# Allegro board demoa2.brd
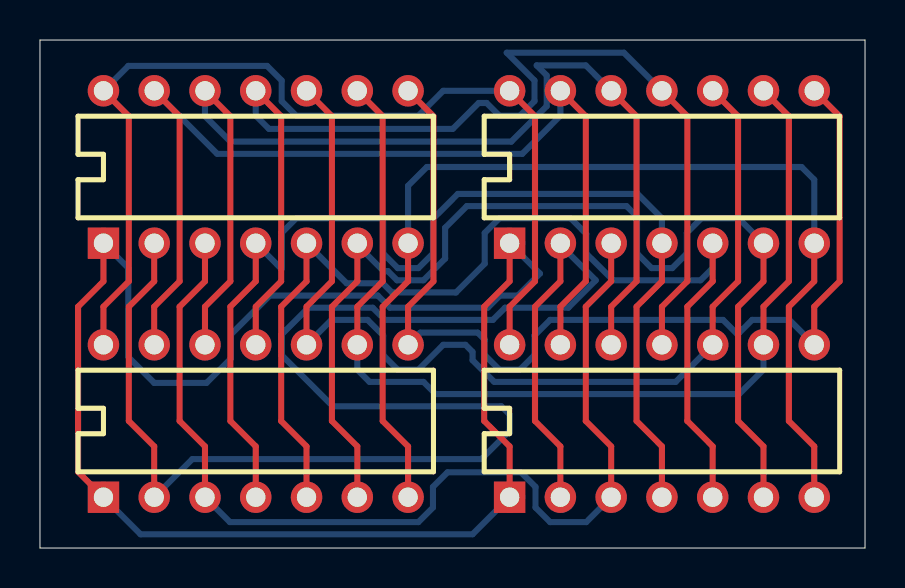
[diagram p0: board, top side]
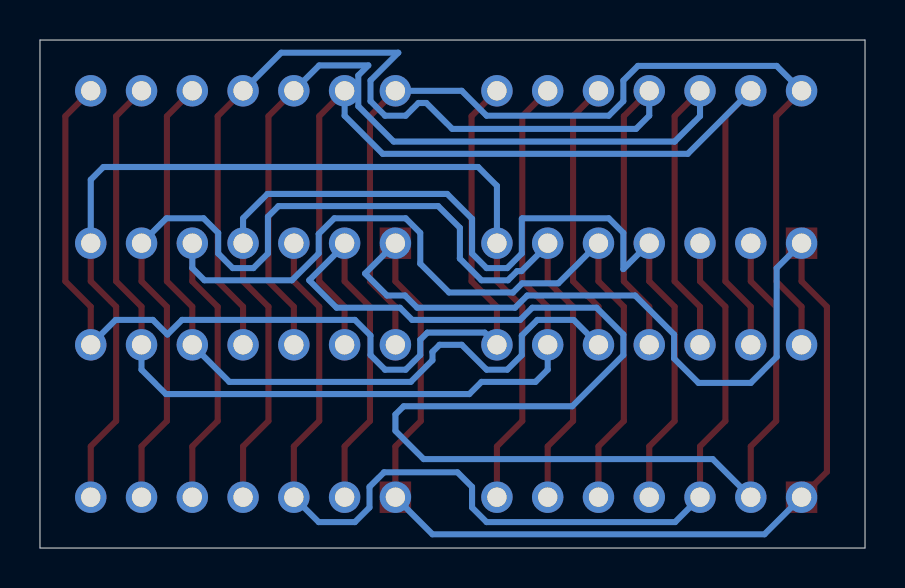
[diagram p1: board, bottom side, seen from below]

Outline 41.27 x 25.4 mm; copper layers: TOP, GND, POWER, INNER1, INNER2, BOTTOM. Coordinates in mm from the lower left corner of the outline.
Outline path: 0,25.4 0,0 41.27,0 41.27,25.4 0,25.4

## Design rules (mm)
nets with their own width: min track width 0.305; nets DAT1 DAT2 DAT3 DAT4 DAT5 DAT6 DAT7 DAT8 DAT9 DAT10 DAT11 DAT12 GND VCC

## Placement (name value [footprint] x y rotation side)
U1  7400  [DIP14]  3.17 15.24 0 top
U2  7400  [DIP14]  23.5 15.24 0 top
U3  7400  [DIP14]  3.17 2.54 0 top
U4  7400  [DIP14]  23.5 2.54 0 top

## Library data of the parts
U1-U4 = 7400

## Footprints (pads in the part's own frame, mm; a bottom-side part is the same pattern mirrored in y, then rotated)
DIP14
  rect 1.575x1.575 hole 0.965: 1(0,0)
  round 1.575 hole 0.965: 2(2.54,0) 3(5.08,0) 4(7.62,0) 5(10.16,0) 6(12.7,0) 7(15.24,0) 8(15.24,7.62) 9(12.7,7.62) 10(10.16,7.62) 11(7.62,7.62) 12(5.08,7.62) 13(2.54,7.62) 14(0,7.62)

## Nets
GND: U1.7(TP-7) U2.7(TP-7) U3.7(TP-7) U4.7(TP-7)
VCC: U1.14(TP-14) U2.14(TP-14) U3.14(TP-14) U4.14(TP-14)
DAT1: U1.2(TP-2) U2.2(TP-2) U3.2(TP-2) U4.2(TP-2)
DAT2: U1.1(TP-1) U2.1(TP-1) U3.1(TP-1) U4.1(TP-1)
DAT3: U1.3(TP-3) U2.3(TP-3) U3.3(TP-3) U4.3(TP-3)
DAT4: U1.5(TP-5) U2.5(TP-5) U3.5(TP-5) U4.5(TP-5)
DAT5: U1.4(TP-4) U2.4(TP-4) U3.4(TP-4) U4.4(TP-4)
DAT6: U1.6(TP-6) U2.6(TP-6) U3.6(TP-6) U4.6(TP-6)
DAT7: U1.10(TP-10) U2.10(TP-10) U3.10(TP-10) U4.10(TP-10)
DAT8: U1.9(TP-9) U2.9(TP-9) U3.9(TP-9) U4.9(TP-9)
DAT9: U1.8(TP-8) U2.8(TP-8) U3.8(TP-8) U4.8(TP-8)
DAT10: U1.13(TP-13) U2.13(TP-13) U3.13(TP-13) U4.13(TP-13)
DAT11: U1.12(TP-12) U2.12(TP-12) U3.12(TP-12) U4.12(TP-12)
DAT12: U1.11(TP-11) U2.11(TP-11) U3.11(TP-11) U4.11(TP-11)

## Routing (per net, layer and track width the routed paths; a pad name or vN(x,y) marks a point on that pad's centre or on a via; arc(x,y) is an arc through that point)
GND: length 54.5
  TOP w0.305: U3.7 18.42,5.08 17.15,6.35 17.15,12.06 18.42,13.34 U1.7 ; U2.7 38.73,13.34 37.46,12.06 37.46,6.35 38.73,5.08 U4.7
  BOTTOM w0.305: U2.7 38.73,18.41 38.1,19.05 19.35,19.05 18.42,18.11 U1.7
VCC: length 50.5
  TOP w0.305: U1.14 4.45,21.59 4.45,13.34 3.17,12.06 U3.14 ; U2.14 24.77,21.59 24.77,13.34 23.5,12.06 U4.14
  BOTTOM w0.305: U2.14 20.18,22.86 18.93,21.62 12.82,21.62 12.09,22.34 12.09,23.38 11.36,24.1 4.42,24.1 U1.14
DAT1: length 81.1
  TOP w0.305: U4.2 26.04,5.08 24.77,6.35 24.77,12.06 26.04,13.34 U2.2 ; U1.2 5.71,13.34 4.45,12.06 4.45,6.35 5.71,5.08 U3.2
  BOTTOM w0.305: U3.2 7.62,4.45 22.08,4.45 23.49,5.86 23.49,6.68 23.08,7.09 14.65,7.09 12.09,9.64 12.09,10.68 13.43,12.01 16.64,12.01 17.25,11.4 22.66,11.4 23.27,12.01 26.43,12.01 27.81,13.39 26.04,15.16 U2.2
DAT2: length 82.3
  TOP w0.305: U3.1 1.91,3.81 1.91,12.06 3.17,13.34 U1.1 ; U2.1 23.5,13.34 22.23,12.06 22.23,6.35 23.5,5.08 U4.1
  BOTTOM w0.305: U1.1 4.42,14 4.42,9.55 5.71,8.26 8.33,8.26 9.55,9.47 9.55,10.68 11.5,12.62 16.9,12.62 17.51,12.01 22.4,12.01 23.01,12.62 23.91,12.62 25.01,13.72 U2.1 ; U4.1 21.64,0.69 5.03,0.69 U3.1
DAT3: length 52.1
  TOP w0.305: U1.3 8.26,13.34 6.98,12.06 6.98,6.35 8.26,5.08 U3.3 ; U2.3 28.58,13.34 27.31,12.06 27.31,6.35 28.58,5.08 U4.3
  BOTTOM w0.305: U3.3 9.5,1.3 18.93,1.3 19.66,2.02 19.66,3.06 20.39,3.78 24.06,3.78 24.79,3.06 24.79,2.02 25.52,1.3 27.33,1.3 U4.3
DAT4: length 54.6
  TOP w0.305: U4.5 33.66,5.08 32.38,6.35 32.38,12.06 33.66,13.34 U2.5 ; U3.5 13.33,5.08 12.06,6.35 12.06,12.06 13.33,13.34 U1.5
  BOTTOM w0.305: U1.5 15.34,13.23 17.15,13.23 17.61,12.78 20.81,12.78 22.25,14.22 22.25,15.76 22.98,16.48 26.55,16.48 27.33,15.7 27.33,14.72 28.67,13.39 33.05,13.39 33.66,14 U2.5
DAT5: length 56.8
  TOP w0.305: U1.4 10.79,13.34 9.53,12.06 9.53,6.35 10.79,5.08 U3.4 ; U4.4 31.12,5.08 29.85,6.35 29.85,12.06 31.12,13.34 U2.4
  BOTTOM w0.305: U2.4 31.12,16.48 29.9,17.7 20.9,17.7 19.66,16.46 19.66,14.72 18.93,14 17.9,14 17.17,14.72 17.17,16.46 17.15,16.48 12.82,16.48 12.09,15.76 12.09,13.94 U1.4
DAT6: length 55.6
  TOP w0.305: U4.6 36.2,5.08 34.92,6.35 34.92,12.06 36.2,13.34 U2.6 ; U3.6 15.88,5.08 14.61,6.35 14.61,12.06 15.88,13.34 U1.6
  BOTTOM w0.305: U1.6 15.88,15.16 17.19,13.84 17.41,13.84 17.86,13.39 19.18,13.39 20.27,14.47 20.27,16.01 21.35,17.09 29.34,17.09 29.87,16.57 29.87,14.72 30.6,14 31.63,14 32.36,14.72 32.36,15.76 33.09,16.48 34.95,16.48 U2.6
DAT7: length 52.2
  TOP w0.305: U2.10 34.92,21.59 34.92,13.34 33.66,12.06 U4.10 ; U3.10 13.33,12.06 14.61,13.34 14.61,21.59 U1.10
  BOTTOM w0.305: U3.10 14.58,11.4 16.39,11.4 17.17,10.62 17.17,9.64 17.9,8.92 18.93,8.92 20.18,10.16 21.29,10.16 21.64,9.8 21.64,9.39 22.73,8.31 31.8,8.31 U4.10
DAT8: length 51.3
  TOP w0.305: U3.9 15.88,12.06 17.15,13.34 17.15,21.59 U1.9 ; U2.9 37.46,21.59 37.46,13.34 36.2,12.06 U4.9
  BOTTOM w0.305: U3.9 15.88,8.92 16.48,8.31 19.18,8.31 19.79,7.7 34.98,7.7 36.2,8.92 U4.9
DAT9: length 52
  TOP w0.305: U1.8 19.69,21.59 19.69,13.34 18.42,12.06 U3.8 ; U4.8 38.73,12.06 40,13.34 40,21.59 U2.8
  BOTTOM w0.305: U4.8 37.49,11.4 35.63,11.4 34.9,10.68 34.17,11.4 25.52,11.4 24.74,10.62 24.74,9.64 24.01,8.92 22.98,8.92 22.25,9.64 22.25,10.41 21.89,10.77 19.02,10.77 U3.8
DAT10: length 51.2
  TOP w0.305: U4.13 26.04,12.06 27.31,13.34 27.31,21.59 U2.13 ; U1.13 6.98,21.59 6.98,13.34 5.71,12.06 U3.13
  BOTTOM w0.305: U2.13 26.04,21.62 24.13,19.71 8.87,19.71 U1.13
DAT11: length 53.6
  TOP w0.305: U2.12 29.85,21.59 29.85,13.34 28.58,12.06 U4.12 ; U3.12 8.26,12.06 9.53,13.34 9.53,21.59 U1.12
  BOTTOM w0.305: U1.12 8.26,21.59 9.53,20.32 23.58,20.32 25.35,22.09 25.35,23.63 24.85,24.13 27.31,24.13 U2.12
DAT12: length 55.6
  TOP w0.305: U4.11 31.12,12.06 32.38,13.34 32.38,21.59 U2.11 ; U1.11 12.06,21.59 12.06,13.34 10.79,12.06 U3.11
  BOTTOM w0.305: U1.11 10.79,21.62 11.46,20.95 20.65,20.95 21.95,22.25 22.34,22.25 22.98,21.62 24.01,21.62 24.74,22.34 24.74,23.38 23.35,24.77 29.21,24.77 U2.11
